# Altium PCB PCB_volume-adjuster.pcbdoc
Units mil, origin at the board's own origin, x right, y up, seen from the top; angles counter-clockwise.
Board outline 2362.2 x 1574.8 mil, 2 copper layers (Top Layer, Bottom Layer); 59 components, 46 nets, 231 pads, 8 vias.
Unrouted connection lines stored in the file: 53.
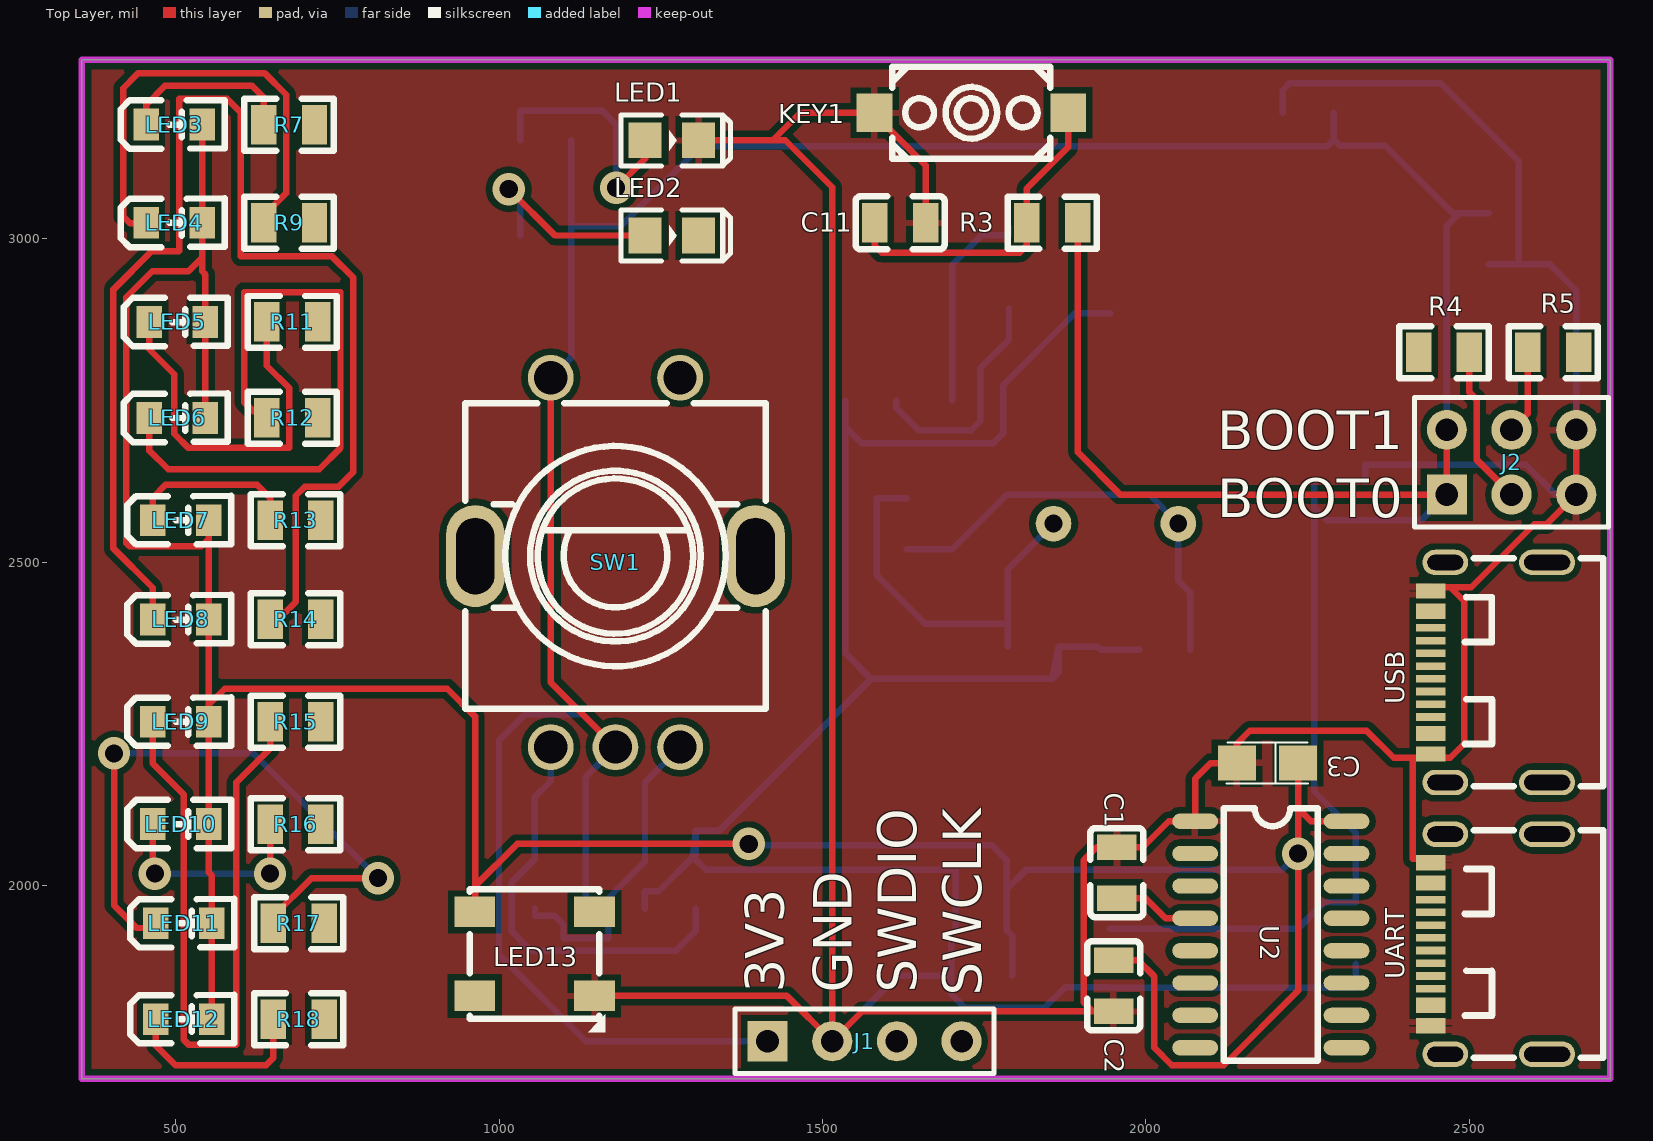
[diagram p0: Top Layer view]
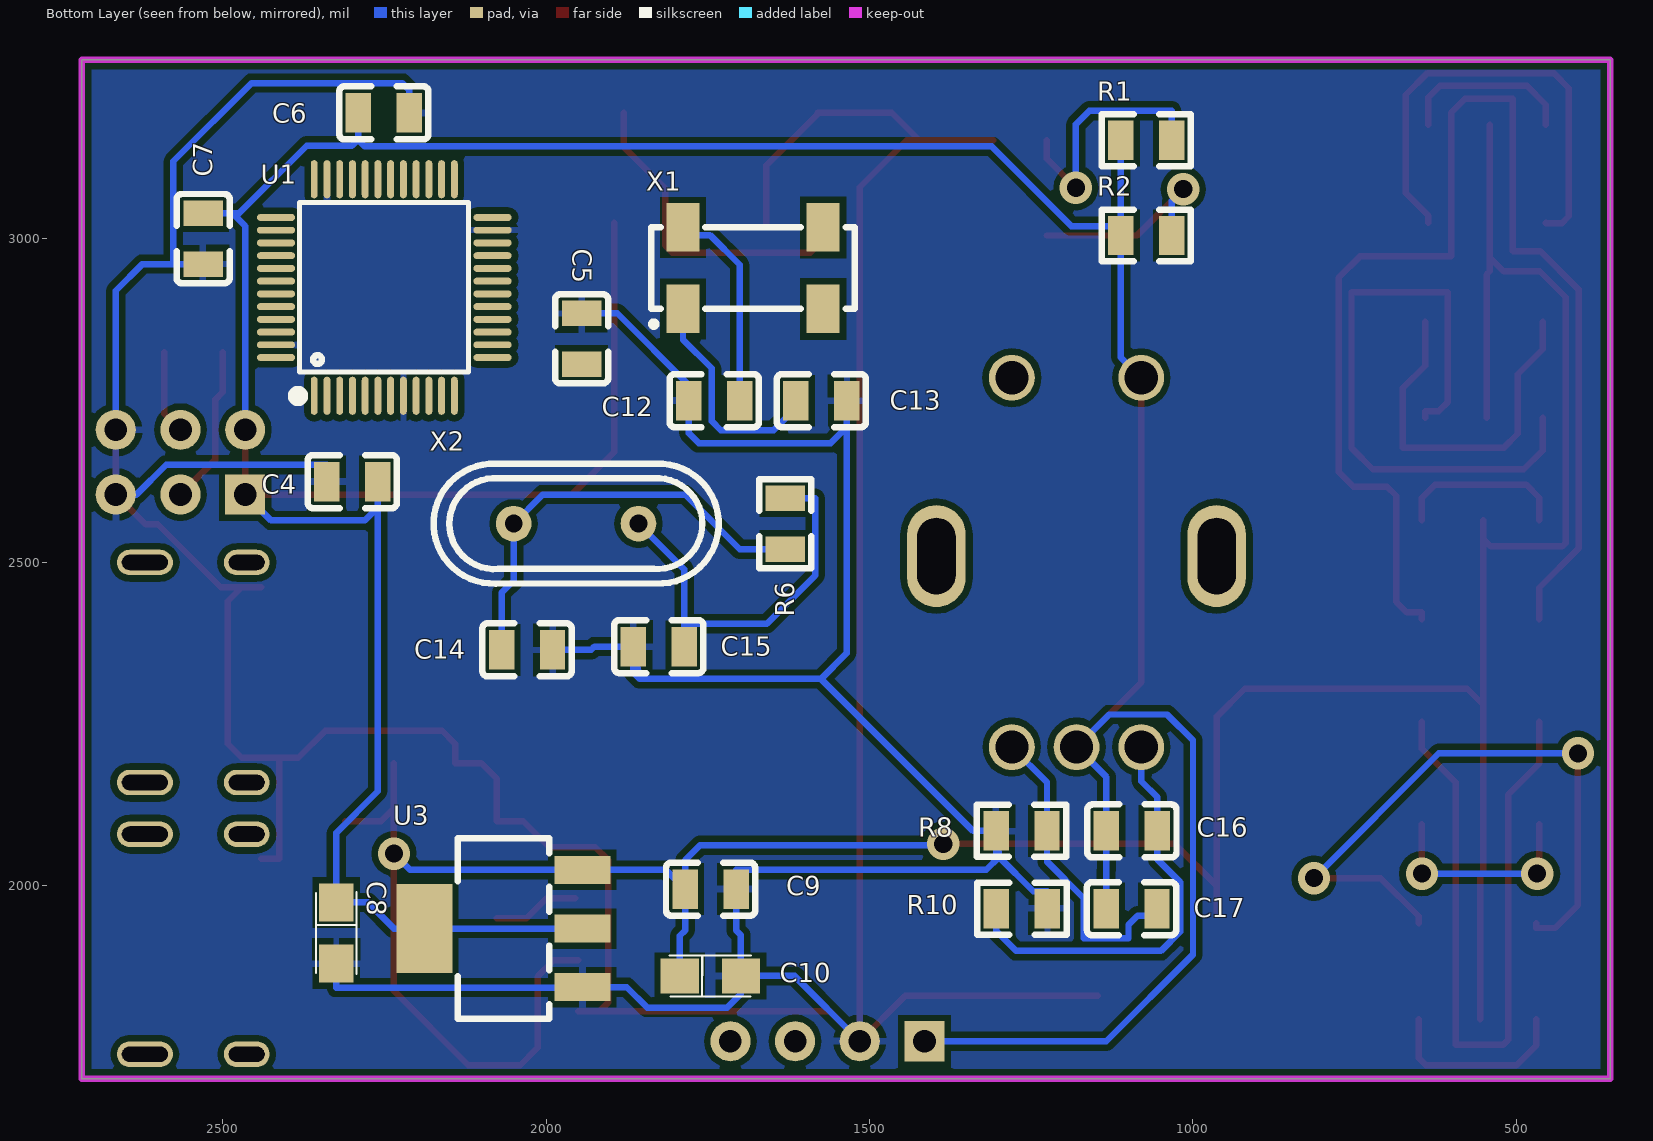
[diagram p1: Bottom Layer view, seen from below]

## Layer stack, top to bottom
Top Solder Mask Layer: solder mask 0.4, Solder Resist, Dk 3.5
Top Layer: signal copper 1.4
Dielectric1: dielectric 12.6, FR-4, Dk 4.8
Bottom Layer: signal copper 1.4
Bottom Solder Mask Layer: solder mask 0.4, Solder Resist, Dk 3.5

## Board outline
355.23,1702.05 2717.43,1702.05 2717.43,3276.85 355.23,3276.85

## Design rules (kind name [scope] priority, off if disabled: settings)
Clearance [All] p1: gap=10 ignorepadtopadclearanceinfootprint=TRUE except(0: Arc-Hole Track-Hole SMDPad-Hole THPad-Hole Via-Hole Fill-Hole Poly-Hole Region-Hole Text-Hole)
PolygonConnect [All] p1: connectstyle=Relief reliefconductorwidth=10 reliefentries=4 polygonreliefangle="90 Angle" airgapwidth=10
RoutingVias [All] p1: holewidth=28 width=50 viastyle="Through Hole" minholewidth=28 minwidth=50 maxholewidth=28 maxwidth=50
SolderMaskExpansion [All] p1: expansion=4 istentingtop=FALSE
Width [All] p1: maxlimit=10 minlimit=10 preferedwidth=10
30 further rules are at their usual default settings.

## Classes and differential pairs
component class 2_外围电路: LED3 LED4 LED5 LED6 LED7 LED8 LED9 LED10 LED11 LED12 LED13 R7 R9 R11 R12 R13 R14 R15 R16 R17 R18 SW1
component class 1_STM32F103C8-core: C1 C2 C3 C4 C5 C6 C7 C8 C9 C10 C11 C12 C13 C14 C15 J1 J2 KEY1 LED1 LED2 R1 R2 R3 R4 R5 R6 U1 U2 U3 UART USB X1 X2

## Components (designator, comment, footprint, x,y, rotation, side; value= is the part's Value field where it differs from the comment)
C1 "0.1u" C0805 1955,2020.63 r270 top
C2 "0.1u" C0805 1950,1845.63 r90 top
C3 "10u" CASE-A_3216 2187.76,2190 r180 top
C4 "0.1u" C0805 2299.37,2625 r180 bottom
C5 "0.1u" C0805 1945,2845.63 r270 bottom
C6 "0.1u" C0805 2250.63,3195 r0 bottom
C7 "0.1u" C0805 2530,3000.63 r90 bottom
C8 "10u" CASE-A_3216 2324.21,1927.24 r270 bottom
C9 "0.1u" C0805 1745.63,1995 r180 bottom
C10 "10u" CASE-A_3216 1745.93,1860.84 r180 bottom
C11 "0.1u" C0805 1620,3025 r0 top
C12 "22p" C0805 1740,2750 r180 bottom
C13 "22p" C0805 1574.37,2750 r0 bottom
C14 "22p" C0805 2029.37,2365 r0 bottom
C15 "22p" C0805 1825.63,2370 r180 bottom
C16 "0.1u" C0805 1094.37,2085 r180 bottom
C17 "0.1u" C0805 1095,1965 r180 bottom
J1 "HDR-M-2.54_1x4" HDR-M-2.54_1X4 1565,1760 r0 top
J2 "HDR-M-2.54_2x3" HDR-M-2.54_2X3 2465,2605 r0 top
KEY1 "K2-3.6×6.1_SMD" KEY-SMD_2P-L6.2-W3.6-LS8.0 1730,3195 r0 top
LED1 "LED-0805_B" LED0805_BLUE 1267.11,3152.48 r0 top
LED2 "LED-0805_B" LED0805_BLUE 1267.11,3005.38 r0 top
LED3 "NCD0805R1" LED0805-RD_RED 497.9,3176.87 r0 top
LED4 "NCD0805R1" LED0805-RD_RED 497.9,3024.96 r0 top
LED5 "NCD0805R1" LED0805-RD_RED 502.9,2871.72 r0 top
LED6 "NCD0805R1" LED0805-RD_RED 502.9,2723.47 r0 top
LED7 "NCD0805R1" LED0805-RD_RED 507.9,2565.23 r0 top
LED8 "NCD0805R1" LED0805-RD_RED 507.9,2411.99 r0 top
LED9 "NCD0805R1" LED0805-RD_RED 507.9,2253.75 r0 top
LED10 "NCD0805R1" LED0805-RD_RED 507.9,2095.5 r0 top
LED11 "NCD0805R1" LED0805-RD_RED 512.9,1942.26 r0 top
LED12 "NCD0805R1" LED0805-RD_RED 512.9,1794.02 r0 top
LED13 "WS2812C" LED-SMD_4P-L5.0-W5.0-LS5.4-TL-1 1055,1895 r0 top
R1 "1k" R0805 1072.11,3152.48 r180 bottom
R2 "1k" R0805 1072.11,3005.38 r180 bottom
R3 "1k" R0805 1855,3025 r0 top
R4 "10k" R0805 2460.63,2825 r0 top
R5 "10k" R0805 2629.37,2825 r0 top
R6 "10M" R0805 1630,2560 r90 bottom
R7 "1.5K" R0805 675.44,3176.87 r0 top
R8 "10k" R0805 1265,2085 r180 bottom
R9 "1.5K" R0805 675.44,3024.96 r0 top
R10 "10k" R0805 1264.37,1965 r180 bottom
R11 "1.5K" R0805 680.44,2871.72 r0 top
R12 "1.5K" R0805 680.44,2723.47 r0 top
R13 "1.5K" R0805 685.44,2565.23 r0 top
R14 "1.5K" R0805 685.44,2411.99 r0 top
R15 "1.5K" R0805 685.44,2253.75 r0 top
R16 "1.5K" R0805 685.44,2095.5 r0 top
R17 "1.5K" R0805 690.44,1942.26 r0 top
R18 "1.5K" R0805 690.44,1794.02 r0 top
SW1 "EC11E153440D" SW-TH_EC11XXXXXXXX 1180,2500 r0 top
U1 "STM32F103C8T6" LQFP-48_L7.0-W7.0-P0.50-LS9.0-BL 2250,2925 r180 bottom
U2 "CH340C" SOP-16_L10.0-W3.9-P1.27-LS6.0-BL 2193,1925 r270 top
U3 "AMS1117-3.3" SOT-223-3_L6.5-W3.4-P2.30-LS7.0-BR 2065.81,1934.16 r180 bottom
UART "USB-310F" USB-C-SMD_20P-P0.50-L6.5-W8.9 2530,1910 r180 top (schematic designator USB1)
USB "USB-310F" USB-C-SMD_20P-P0.50-L6.5-W8.9 2530,2330 r180 top (schematic designator USB2)
X1 "32.768KHz" MC-306_4P-L8.0-W3.2-P5.5-BL 1680,2955 r180 bottom
X2 "8MHz" OSC-TH_L11.1-W4.7-P4.88 1953.55,2560 r180 bottom

## Footprints (in the part's own frame and the unit in brackets; to place one, negate y for a bottom-side part, rotate by r counter-clockwise, add the part's x,y. Pads: shape width x height; smd on the part's side, far side on the other; paste and mask are expansions set on the pad)
C0805 [mm]
  rect 1x1.55 smd mask+0.102: 1(-1,0) 2(1,0)
  silkscreen extent -1.75,-1.04 1.75,1.04
CASE-A_3216 [mil]
  rect 59.05x53.5 smd mask+2: 1(-47.24,0) 2(47.24,0)
  silkscreen extent -63,-32 63,32
HDR-M-2.54_1X4 [mil]
  rect 62x62 hole 35 mask+2: 1(-150,0)
  round 62 hole 35 mask+2: 2(-50,0) 3(50,0) 4(150,0)
  silkscreen extent -200,-50 200,50
HDR-M-2.54_2X3 [mil]
  rect 62x62 hole 35 mask+2: 1(0,0)
  round 62 hole 35 mask+2: 2(0,100) 3(100,0) 4(100,100) 5(200,0) 6(200,100)
  silkscreen extent -50,-50 250,150
KEY-SMD_2P-L6.2-W3.6-LS8.0 [mm]
  rect 1.4x1.5 smd mask+0.051: 1(-3.8,0) 2(3.8,0)
  silkscreen extent -3.1,-1.8 3.1,1.8
LED0805-RD_RED [mm]
  rect 1x1.25 smd mask+0.051: 1(-1.1,0) 2(1.1,0)
  silkscreen extent -2.1,-0.95 1.98,0.96
LED0805_BLUE [mil]
  rect 51.2x55.1 smd mask+2: 1(-41.35,0) 2(41.35,0)
  silkscreen extent -79,-39 91,39
LED-SMD_4P-L5.0-W5.0-LS5.4-TL-1 [mm]
  rect 1.6x1.2 smd mask+0.05: 1(-2.35,1.65) 2(-2.35,-1.65) 3(2.35,-1.65) 4(2.35,1.65)
  silkscreen extent -2.54,-3.09 2.77,2.54
LQFP-48_L7.0-W7.0-P0.50-LS9.0-BL [mm]
  oval 0.27x1.5 smd mask+0.05: 1(-2.75,-4.25) 2(-2.25,-4.25) 3(-1.75,-4.25) 4(-1.25,-4.25) 5(-0.75,-4.25) 6(-0.25,-4.25) 7(0.25,-4.25) 8(0.75,-4.25) 9(1.25,-4.25) 10(1.75,-4.25) 11(2.25,-4.25) 12(2.75,-4.25) 25(2.75,4.25) 26(2.25,4.25) 27(1.75,4.25) 28(1.25,4.25) 29(0.75,4.25) 30(0.25,4.25) 31(-0.25,4.25) 32(-0.75,4.25) 33(-1.25,4.25) 34(-1.75,4.25) 35(-2.25,4.25) 36(-2.75,4.25)
  oval 1.5x0.27 smd mask+0.05: 13(4.25,-2.75) 14(4.25,-2.25) 15(4.25,-1.75) 16(4.25,-1.25) 17(4.25,-0.75) 18(4.25,-0.25) 19(4.25,0.25) 20(4.25,0.75) 21(4.25,1.25) 22(4.25,1.75) 23(4.25,2.25) 24(4.25,2.75) 37(-4.25,2.75) 38(-4.25,2.25) 39(-4.25,1.75) 40(-4.25,1.25) 41(-4.25,0.75) 42(-4.25,0.25) 43(-4.25,-0.25) 44(-4.25,-0.75) 45(-4.25,-1.25) 46(-4.25,-1.75) 47(-4.25,-2.25) 48(-4.25,-2.75)
  silkscreen extent -3.59,-4.46 3.3,3.34
MC-306_4P-L8.0-W3.2-P5.5-BL [mil]
  rect 51.2x74.8 smd mask+4: 1(-108.27,-63) 2(108.27,-63) 3(108.27,63) 4(-108.27,63)
  silkscreen extent -157,-91 157,63
OSC-TH_L11.1-W4.7-P4.88 [mm]
  round 1.4 hole 0.7 mask+0.051: 1(-2.45,0) 2(2.45,0)
  silkscreen extent -5.59,-2.35 5.6,2.35
R0805 [mm]
  rect 1x1.55 smd mask+0.102: 1(-1,0) 2(1,0)
  silkscreen extent -1.75,-1.02 1.75,1.02
SOP-16_L10.0-W3.9-P1.27-LS6.0-BL [mm]
  oval 0.6x1.8 smd mask+0.102: 1(-4.445,-2.972) 2(-3.175,-2.972) 3(-1.905,-2.972) 4(-0.635,-2.972) 5(0.635,-2.972) 6(1.905,-2.972) 7(3.175,-2.972) 8(4.445,-2.972) 9(4.445,2.972) 10(3.175,2.972) 11(1.905,2.972) 12(0.635,2.972) 13(-0.635,2.972) 14(-1.905,2.972) 15(-3.175,2.972) 16(-4.445,2.972)
  silkscreen extent -4.95,-1.85 4.95,1.85
SOT-223-3_L6.5-W3.4-P2.30-LS7.0-BR [mm]
  rect 2.2x1.1 smd mask+0.102: 1(3.099,-2.3) 2(3.099,0) 3(3.099,2.3)
  rect 2.2x3.5 smd mask+0.102: 4(-3.099,0)
  silkscreen extent -1.8,-3.55 1.8,3.55
SW-TH_EC11XXXXXXXX [mm]
  oval 2.3x4 hole 1.5 slot 3 at 90 deg mask+0.051: 6(5.5,0.25) 7(-5.5,0.25)
  round 1.8 hole 1.3 mask+0.051: A(-2.54,-7.25) B(2.54,-7.25) C(0,-7.25) D(-2.54,7.25) E(2.54,7.25)
  silkscreen extent -5.9,-5.75 5.9,6.25
USB-C-SMD_20P-P0.50-L6.5-W8.9 [mm]
  oval 2.2x1 hole 0.6 slot 1.8 at 0 deg mask+0.05: 0(-2.287,4.32) 1(-2.287,-4.32)
  oval 1.8x1 hole 0.6 slot 1.4 at 0 deg mask+0.05: 2(1.713,-4.32) 3(1.713,4.32)
  rect 1.15x0.3 smd mask+0.05: A1(2.288,3.35) A4(2.288,2.55) A5(2.288,1.25) A6(2.288,0.25) A7(2.288,-0.25) A8(2.288,-1.25) A9(2.288,-2.55) A12(2.288,-3.35) B1(2.288,-3.05) B4(2.288,-2.25) B5(2.288,-1.75) B6(2.288,-0.75) B7(2.288,0.75) B8(2.288,1.75) B9(2.288,2.25) B12(2.288,3.05)
  silkscreen extent -4.49,-4.48 1.06,4.46

## Part data
KEY1: library part K2-1107ST-A4SW-06, Add into BOM=yes, Convert to PCB=yes, Device=K2-1107ST-A4SW-06, Manufacturer Part=K2-1107ST-A4SW-06, Name=K2-3.6×6.1_SMD, Origin Footprint=KEY-SMD_2P-L6.2-W3.6-LS8.0, Supplier=LCSC, Supplier Part=C118141, Symbol=K2-3.6×6.1_SMD, 制造商=韩国韩荣
LED1 LED2: library part D-B080508B1-KS2, Manufacturer="方舟 ARKLED", Add into BOM=yes, Convert to PCB=yes, Device=D-B080508B1-KS2, Manufacturer Part=D-B080508B1-KS2, Name=LED-0805_B, Origin Footprint=LED0805_BLUE, Supplier Part=C108412, Symbol=LED-0805_B
LED3 LED4 LED5 LED6 LED7 LED8 LED9 LED10 LED11 LED12: "发光颜色:红灯;", Emitted Color=红灯, JLCPCB Part Class="Basic Part", Manufacturer=国星光电, Add into BOM=yes, Convert to PCB=yes, Datasheet=https://atta.szlcsc.com/upload/public/pdf/source/20200820/C84256_F0A75A43B3EAD75808600A0514C76B99.pdf, Device=NCD0805R1, LCSC Part Name=红灯, Manufacturer Part=NCD0805R1, Name=NCD0805R1, Supplier=LCSC, Supplier Footprint=0805, Supplier Part=C84256, Symbol=FC-2012HRK-620D
LED13: "发光颜色:RGB三色;", Emitted Color=RGB三色, JLCPCB Part Class="Extended Part", LCSC Part Name="RGB三色 （注意防潮，请查阅规格书中对应具体内容）", Manufacturer=worldsemi, Add into BOM=yes, Convert to PCB=yes, Datasheet=https://atta.szlcsc.com/upload/public/pdf/source/20171019/C114587_15083980074721044737.pdf, Device=WS2812C, Manufacturer Part=WS2812C, Name=WS2812C, Supplier=LCSC, Supplier Footprint=SMD5050, Supplier Part=C114587, Symbol=WS2812C
R7 R9 R11 R12 R13 R14 R15 R16 R17 R18: library part AC0805FR-071K5L, JLCPCB Part Class="Extended Part", Manufacturer=YAGEO(国巨), Resistance=1.5kΩ, Add into BOM=yes, Convert to PCB=yes, Device=AC0805FR-071K5L, Manufacturer Part=AC0805FR-071K5L, Name=1.5K, Origin Footprint=R0805, Supplier=LCSC, Supplier Part=C144580, Symbol=1.5K
SW1: JLCPCB Part Class="Extended Part", LCSC Part Name=编码器, Manufacturer=ALPSALPINE(阿尔卑斯阿尔派), Add into BOM=yes, Convert to PCB=yes, Datasheet=https://atta.szlcsc.com/upload/public/pdf/source/20200526/C370992_95C13CAE7E7FAF27485295BD459A5993.pdf, Device=EC11E153440D, Manufacturer Part=EC11E153440D, Name=EC11E153440D, Supplier=LCSC, Supplier Footprint=插件, Supplier Part=C370992, Symbol=EC11E153440D
U1: JLCPCB Part Class=Basic, Manufacturer=STMicroelectronics, Add into BOM=yes, Convert to PCB=yes, Device=STM32F103C8T6, image=//image.lceda.cn/szlcsc/C8734.jpg, Manufacturer Part=STM32F103C8T6, Name=STM32F103C8T6, Origin Footprint=LQFP-48_L7.0-W7.0-P0.50-LS9.0-BL, Supplier=LCSC, Supplier Part=C8734, Symbol=STM32F103C8T6
U2: JLCPCB Part Class=Extend, Manufacturer=WCH, Add into BOM=yes, Convert to PCB=yes, Device=CH340C, Manufacturer Part=CH340C, Name=CH340C, Origin Footprint=SOP-16_L10.0-W3.9-P1.27-LS6.0-BL, Supplier=LCSC, Supplier Part=C84681, Symbol=CH340C
U3: JLCPCB Part Class=Basic, Manufacturer=AMS, Add into BOM=yes, Convert to PCB=yes, Device=AMS1117-3.3, image=//image.lceda.cn/szlcsc/C6186.jpg, Manufacturer Part=AMS1117-3.3, Name=AMS1117-3.3, Origin Footprint=SOT-223-3_L6.5-W3.4-P2.30-LS7.0-BR, Supplier=LCSC, Supplier Part=C6186, Symbol=AMS1117-3.3
UART USB: Manufacturer=HOOYA, Add into BOM=yes, Convert to PCB=yes, Device=USB-310F, Manufacturer Part=USB-310F, Name=USB-310F, Origin Footprint=USB-C-SMD_20P-P0.50-L6.5-W8.9, Supplier=LCSC, Supplier Part=C309365, Symbol=USB-310F
X1: library part Q13MC3061000300, JLCPCB Part Class=Extend, Manufacturer=EPSON, Add into BOM=yes, Convert to PCB=yes, Device=Q13MC3061000300, Manufacturer Part=Q13MC3061000300, Name=32.768KHz, Origin Footprint=MC-306_4P-L8.0-W3.2-P5.5-BL, Supplier=LCSC, Supplier Part=C16320, Symbol=32.768KHz
X2: library part S1C80000VWGAC, "频率:8MHz;频率公差:±20ppm;频率稳定度:±30ppm;负载电容:16pF;", Equivalent Series Resistance (ESR)=60Ω, Frequency Stability=±30ppm, Frequency Tolerance=±20ppm, JLCPCB Part Class="Extended Part", LCSC Part Name="8MHz ±20ppm 内置负载电容:16pF", Load Capacitance=16pF, Manufacturer=JYJE(晶友嘉), Operating Temperature=-40℃~+85℃, Add into BOM=yes, Convert to PCB=yes, Crystal Type=直插无源晶振, Datasheet=https://atta.szlcsc.com/upload/public/pdf/source/20210114/C2149361_EC5FF9631B356CE93CF7A73B2F67D17A.pdf, Device=S1C80000VWGAC, Manufacturer Part=S1C80000VWGAC, Name=8MHz, Supplier=LCSC, Supplier Footprint=HC-49S, Supplier Part=C2826849, Symbol=S1C80000VWGAC
C1 C2 C4 C5 C6 C7 C9 C11 C16 C17: Add into BOM=yes, Convert to PCB=yes, Device=0.1u, Name=0.1u, Origin Footprint=C0805, Symbol=0.1u
C3 C8 C10: Add into BOM=yes, Convert to PCB=yes, Device=10u, Name=10u, Origin Footprint=CASE-A_3216, Symbol=10u
C12 C13 C14 C15: Add into BOM=yes, Convert to PCB=yes, Device=22p, Name=22p, Origin Footprint=C0805, Symbol=22p
J1: Add into BOM=yes, Convert to PCB=yes, Device=HDR-M-2.54_1x4, Name=HDR-M-2.54_1x4, Origin Footprint=HDR-M-2.54_1X4, Supplier=LCSC, Supplier Part=C124378, Symbol=HDR-M-2.54_1x4
J2: Add into BOM=yes, Convert to PCB=yes, Device=HDR-M-2.54_2x3, Name=HDR-M-2.54_2x3, Origin Footprint=HDR-M-2.54_2X3, Supplier=LCSC, Supplier Part=C65114, Symbol=HDR-M-2.54_2x3
R1 R2 R3: Add into BOM=yes, Convert to PCB=yes, Device=1k, Name=1k, Origin Footprint=R0805, Symbol=1k
R4 R5 R8 R10: Add into BOM=yes, Convert to PCB=yes, Device=10k, Name=10k, Origin Footprint=R0805, Symbol=10k
R6: Add into BOM=yes, Convert to PCB=yes, Device=10M, Name=10M, Origin Footprint=R0805, Symbol=10M

## Via types
v1: diameter 50, hole 28, Top Layer to Bottom Layer, 8 vias

## Nets (pads, with @x,y where several pads share a name; then routed paths per layer and width w, separated by ;. In a path a pad name is that pad's centre, name@x,y a point inside that pad or via, vN(x,y) a via of type N, cw(c..) or ccw(c..) an arc to the next point about the centre after c; other vN are vias at no path point)
3V3: C4.2 C5.2 C6.2 C7.2 C8.1 C16.1 C17.1 J1.1 J2.1 J2.2 R1.1 R2.1 R3.2 SW1.C SW1.D U1.1 U1.9 U1.24 U1.36 U1.48 U3.2 U3.4 | length 6542.9
  Top Layer w10: SW1.D 1080,2314.57 SW1.C ; R3.2 1894.37,2670.63 1960,2605 J2.1 J2.2
  Bottom Layer w10: SW1.D 1111.48,2816.92 R2.1 R2.1@1111.48,3020.52 ; R1.1 1111.48,3078 R2.1@1111.48,3020.52 ; C17.1 1134.37,2024 1133.74,2024.63 C16.1 1133.74,2168.31 SW1.C 1129.56,2265 1040,2265 1000,2225 1000,1894 1134,1760 J1.1 ; U3.2 U3.4 2235,1934.16 2275.32,1974.48 C8.1 2324.21,2082 2260,2146.21 2260,2585 ; C4.2 2260,2585 ; C6.2 2290,3154 ; J2.1 2425,2565 2280,2565 2260,2585 ; J2.2 2465,3020 2485,3040 ; C7.2 2485,3040 ; R2.1@1111.48,3020.52 1112,3020 1188,3020 1311,3143 2280,3143 2290,3153 2290,3154 ; 2290,3154 2300,3144 2370,3144 2474,3040 2485,3040
+5V: C2.2 C3.1 C9.1 C10.1 LED3.2 LED4.2 LED5.2 LED6.2 LED7.2 LED8.2 LED9.2 LED10.2 LED11.2 LED12.2 LED13.1 U2.16 U3.3 UART.A4 UART.A9 UART.B4 UART.B9 USB.A4 USB.A9 USB.B4 USB.B9 | length 5041.8
  Top Layer w10: LED3.2 LED4.2 541.21,2971.21 ; LED6.2 LED5.2 546.21,2945 541.21,2950 541.21,2971.21 ; LED7.2 551.21,2536.21 ; LED12.2 LED11.2 556.21,2016 551.21,2021 LED10.2 LED9.2 551.21,2280 ; LED13.1 963,1959.97 963,2000 ; v1(1386,2065) 1028,2065 963,2000 ; C2.2 1988,1885 2013,1860 2013,1750 2040,1723 2120,1723 2235,1838 v1(2235,2050) 2235,2120 ; C3.1 2235,2120 ; U2.16 2255,2100 2235,2120 ; 541.21,2971.21 520,2950 464,2950 424,2910 424,2530 429,2525 540,2525 551.21,2536.21 ; 551.21,2280 LED8.2 551.21,2536.21 ; 551.21,2280 576.21,2305 920,2305 963,2262 963,2000
  Bottom Layer w10: v1(1386,2065) 1388,2063 1762,2063 1785,2040 C9.1 ; C10.1 1793.17,1923 1785,1931.18 C9.1 ; v1(2235,2050) 2209.71,2024.71 U3.3 1814.71,2024.71 C9.1
BOOT0: R4.1 U1.44
BOOT1: R5.2 U1.20
D+: U2.5 UART.A6 UART.B6
D-: U2.6 UART.A7 UART.B7
EC11_A: C16.2 R10.1 SW1.A U1.25 | length 654
  Bottom Layer w10: SW1.A 1080,2162 1055,2137 C16.2 1055,2041 1020,2006 1020,1929 1049.51,1899.49 1273.23,1899.49 1303.74,1930 R10.1
EC11_B: C17.2 R8.2 SW1.B U1.26 | length 491.8
  Bottom Layer w10: C17.2 1055.63,1954 1085.68,1954 1099.68,1940 1099.68,1919.49 1169.06,1919.49 1169.06,1981.06 1225.63,2037.63 R8.2 1225.63,2160.2 SW1.B
EC11_SW: SW1.E U1.27
GND: C1.1 C2.1 C3.2 C4.1 C5.1 C6.1 C7.1 C8.2 C9.2 C10.2 C11.2 C12.1 C13.1 C14.1 C15.1 J1.2 J2.5 J2.6 KEY1.1 LED1.2 LED13.3 R8.1 R10.2 U1.8 U1.23 U1.35 U1.47 U2.1 U3.1 UART.A1 UART.A12 UART.B1 UART.B12 USB.A1 USB.A12 USB.B1 USB.B12 | length 9549
  Top Layer w10: LED13.3 1444.96,1830.04 J1.2 ; LED1.2 1423,3152.48 ; C11.2 1659.37,3114 1580.4,3192.97 KEY1.1 1465.52,3195 1423,3152.48 ; C2.1 1917.74,1806.26 ; UART.A12 2412,2041.89 2412,2198.11 ; USB.A12 2470.11,2461.89 ; J2.6 J2.5 2619,2559 2600,2559 2502.89,2461.89 2470.11,2461.89 ; 1423,3152.48 1442.52,3152.48 1515,3080 J1.2 ; J1.2 1561.26,1806.26 1917.74,1806.26 ; 1917.74,1806.26 1904,1820 1904,2040 1924,2060 C1.1 1995,2060 2035,2100 U2.1 2076,2166 2100,2190 C3.2 2140.52,2220 2160.52,2240 2341,2240 2382.89,2198.11 2412,2198.11 ; 2412,2198.11 USB.A1 2470.11,2198.11 2492,2220 2492,2440 2470.11,2461.89
  Bottom Layer w10: R10.2 1225,1991.96 1246.96,1991.96 1299.68,2044.68 ; J1.2 1615.84,1860.84 C10.2 ; C13.1 1535,2709.49 ; C5.1 1890,2885 1779.37,2774.37 C12.1 1779.37,2700 1763.86,2684.49 1560,2684.49 1535,2709.49 ; C14.1 1930,2365 1925,2370 C15.1 ; C6.1 2211.26,3230 2222.26,3241 2455,3241 2576,3120 2576,2961.26 ; C8.2 2324.21,1843 1943.81,1843 U3.1 1875,1843.61 1843.39,1812 1720,1812 1698.69,1833.31 C10.2 ; C4.1 2338.74,2651 2587,2651 2633,2605 J2.5 ; C7.1 2576,2961.26 ; J2.6 2665,2920 2623.74,2961.26 2576,2961.26 ; 1299.68,2044.68 1304.37,2049.37 R8.1 ; 1299.68,2044.68 1319.37,2025 1706.26,2025 C9.2 1706.26,1931.56 1698.69,1924 C10.2 ; 1299.68,2044.68 R8.1 ; R8.1 1340,2085 1575,2320 ; 1535,2709.49 1535,2360 1575,2320 ; 1575,2320 1855,2320 ; 1855,2320 C15.1 ; 1855,2320 1865,2330 C15.1
LED: LED2.2 U1.2
LED_RGB: LED13.4 U1.28
NetJ2_3: J2.3 R4.2 | length 246.9
  Top Layer w10: R4.2 2500,2763 2511,2752 2511,2659 J2.3
NetJ2_4: J2.4 R5.1 | length 130.4
  Top Layer w10: J2.4 2590,2730 R5.1
NetLED1_1: LED1.1 R1.2 | length 392
  Top Layer w10: v1(1181,3079.24) 1225.76,3124 LED1.1
  Bottom Layer w10: R1.2 1032.74,3198 1160,3198 1181,3177 v1(1181,3079.24)
NetLED2_1: LED2.1 R2.2 | length 319.4
  Top Layer w10: v1(1015,3077) 1086.62,3005.38 LED2.1
  Bottom Layer w10: v1(1015,3077) 1032.74,3059.26 R2.2
NetLED3_1: LED3.1 R7.1 | length 273.5
  Top Layer w10: LED3.1 454.59,3207.59 483.49,3236.49 618.59,3236.49 636.07,3219 R7.1
NetLED4_1: LED4.1 R9.1 | length 727.2
  Top Layer w10: LED4.1 454.59,3024 430,3024 419,3035 419,3233 442.49,3256.49 637.51,3256.49 671,3223 671,3070.93 636.07,3036 R9.1
NetLED5_1: LED5.1 R11.1 | length 584.9
  Top Layer w10: LED5.1 459.59,2829.41 498,2791 498,2699 520,2677 676,2677 676,2769.07 641.07,2804 R11.1
NetLED6_1: LED6.1 R12.1 | length 983
  Top Layer w10: LED6.1 459.59,2673 488.59,2644 722,2644 755,2677 755,2918 606,2918 606,2748 620,2734 641.07,2734 R12.1
NetLED7_1: LED7.1 R13.1 | length 267.6
  Top Layer w10: LED7.1 464.59,2600 484.59,2620 626.07,2620 646.07,2600 R13.1
NetLED8_1: LED8.1 R14.1 | length 2036.2
  Top Layer w10: LED8.1 464.59,2461 404,2521.59 404,2922 463,2981 505,2981 506,2982 506,3216.49 580,3216.49 601,3195.49 601,2973 742,2973 775,2940 775,2640 752,2617 700,2617 686,2603 686,2439 670,2423 646.07,2423 R14.1
NetLED9_1: LED9.1 R15.1 | length 1117.1
  Top Layer w10: LED9.1 464.59,2189.41 513,2141 513,1762 520.74,1754.26 594,1754.26 594,2159.93 646.07,2212 R15.1
NetLED10_1: LED10.1 R16.1 | length 332.5
  Top Layer w10: LED10.1 464.59,2022.41 v1(468,2019) ; v1(646.07,2019) R16.1
  Bottom Layer w10: v1(468,2019) v1(646.07,2019)
NetLED11_1: LED11.1 R17.1 | length 1006.4
  Top Layer w10: v1(405,2205) 405,1970 440,1935 469.59,1935 LED11.1 ; R17.1 651.07,1953 710.07,2012 v1(813,2012)
  Bottom Layer w10: v1(405,2205) 620,2205 v1(813,2012)
NetLED12_1: LED12.1 R18.1 | length 299.2
  Top Layer w10: LED12.1 469.59,1753.41 500,1723 640,1723 651.07,1734.07 R18.1
OCS32_IN: C12.2 U1.3 X1.4 | length 328.7
  Bottom Layer w10: C12.2 1700.63,2960 1746.63,3006 1788.27,3006 X1.4
OCS32_OUT: C13.2 U1.4 X1.1 | length 353.2
  Bottom Layer w10: C13.2 1613.74,2739 1648.25,2704.49 1730,2704.49 1744,2718.49 1744,2800 1788.27,2844.27 X1.1
OCS_IN: C14.2 R6.1 U1.5 X2.1 | length 676.3
  Bottom Layer w10: R6.1 1700.63,2520.63 1785,2605 2005,2605 X2.1 2050,2471.74 2068.74,2453 C14.2
OCS_OUT: C15.2 R6.2 U1.6 X2.2 | length 617.8
  Bottom Layer w10: R6.2 1584,2599.37 1584,2480 1658.52,2405.48 1786.26,2405.48 ; C15.2 1786.26,2405.48 ; X2.2 1786.26,2489.16 1786.26,2405.48
PWM1: R7.2 U1.10
PWM2: R9.2 U1.11
PWM3: R11.2 U1.13
PWM4: R12.2 U1.16
PWM5: R13.2 U1.17
PWM6: R14.2 U1.19
PWM7: R15.2 U1.32
PWM8: R16.2 U1.42
PWM9: R17.2 U1.43
PWM10: R18.2 U1.46
RESET: C11.1 KEY1.2 R3.1 U1.7 | length 510.6
  Top Layer w10: C11.1 1580.63,2990 1591.63,2979 1804.63,2979 1815.63,2990 R3.1 1815.63,3078 1879.6,3141.97 KEY1.2
SWCLK: J1.4 U1.37
SWIO: J1.3 U1.34
USART1_RX: U1.31 U2.2
USART1_TX: U1.30 U2.3
V3: C1.2 U2.4 | length 133.9
  Top Layer w10: C1.2 1999,1981.26 2030.26,1950 U2.4
pads on no net: LED13.2 SW1.6 SW1.7 U1.12 U1.14 U1.15 U1.18 U1.21 U1.22 U1.29 U1.33 U1.38 U1.39 U1.40 U1.41 U1.45 U2.7 U2.8 U2.9 U2.10 U2.11 U2.12 U2.13 U2.14 U2.15 UART.0 UART.1 UART.2 UART.3 UART.A5 UART.A8 UART.B5 UART.B8 USB.0 USB.1 USB.2 USB.3 USB.A5 USB.A6 USB.A7 USB.A8 USB.B5 USB.B6 USB.B7 USB.B8 X1.2 X1.3

## Polygon pours and split planes (outlines as drawn)
GND on Top Layer "Top Layer-No Net" (solid, pour order 0): 355.23,1702.05 355.23,3276.85 2717.43,3276.85 2717.43,1702.05
GND on Bottom Layer "Bottom Layer-No Net" (solid, pour order 1): 355.23,1702.05 355.23,3276.85 2717.43,3276.85 2717.43,1702.05

## Keep-outs
Board Outline Layer:
  the board outline again, w10

## Silkscreen, mask and mechanical layers (free items; w line width, h text height)
Top Silkscreen Layer:
  text "BOOT1" at 2110,2675 h60
  text "BOOT0" at 2110,2570 h60
  text "3V3" at 1440,1835 h60 r90
  text "GND" at 1545,1835 h60 r90
  text "SWDIO" at 1645,1835 h60 r90
  text "SWCLK" at 1745,1830 h60 r90